# Altium PCB MD5133-A01-02.PcbDoc
Units mil, origin at the board's own origin, x right, y up, seen from the top; angles counter-clockwise.
Board outline 1563 x 997.14 mil, 2 copper layers (TopLayer, BottomLayer); 30 components, 24 nets, 236 pads, 0 vias.
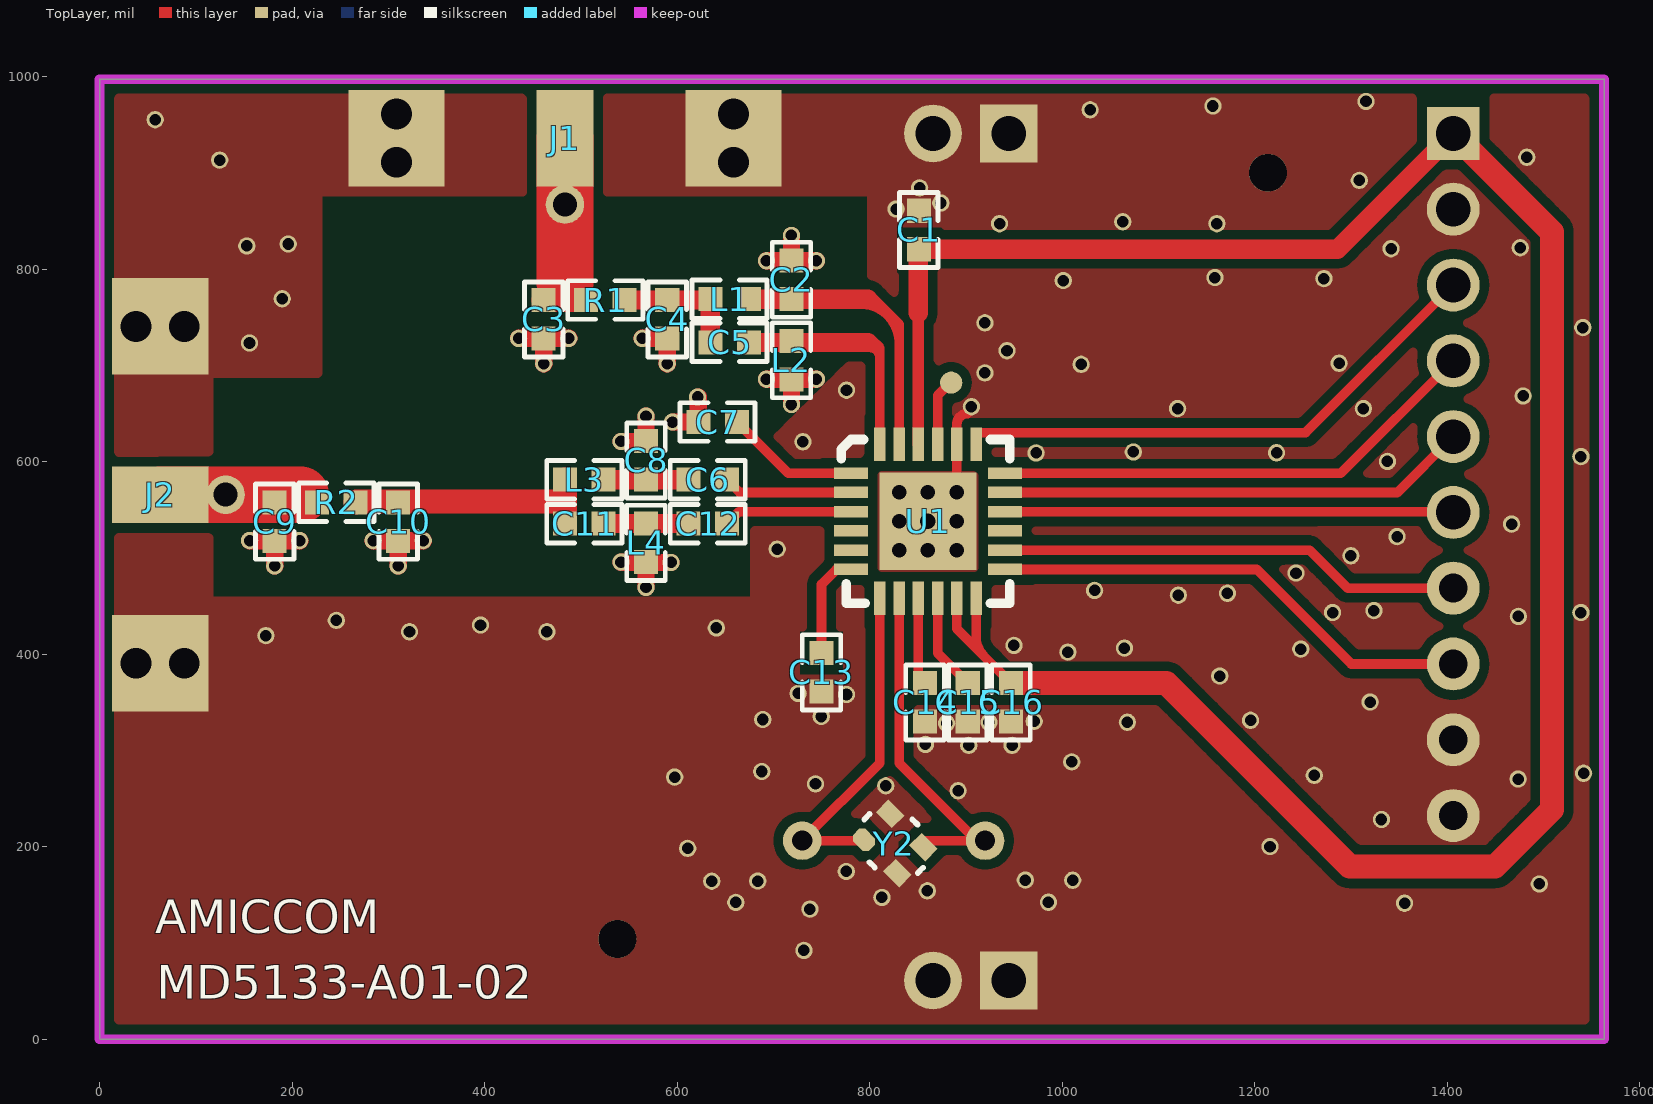
[diagram p0: TopLayer view]
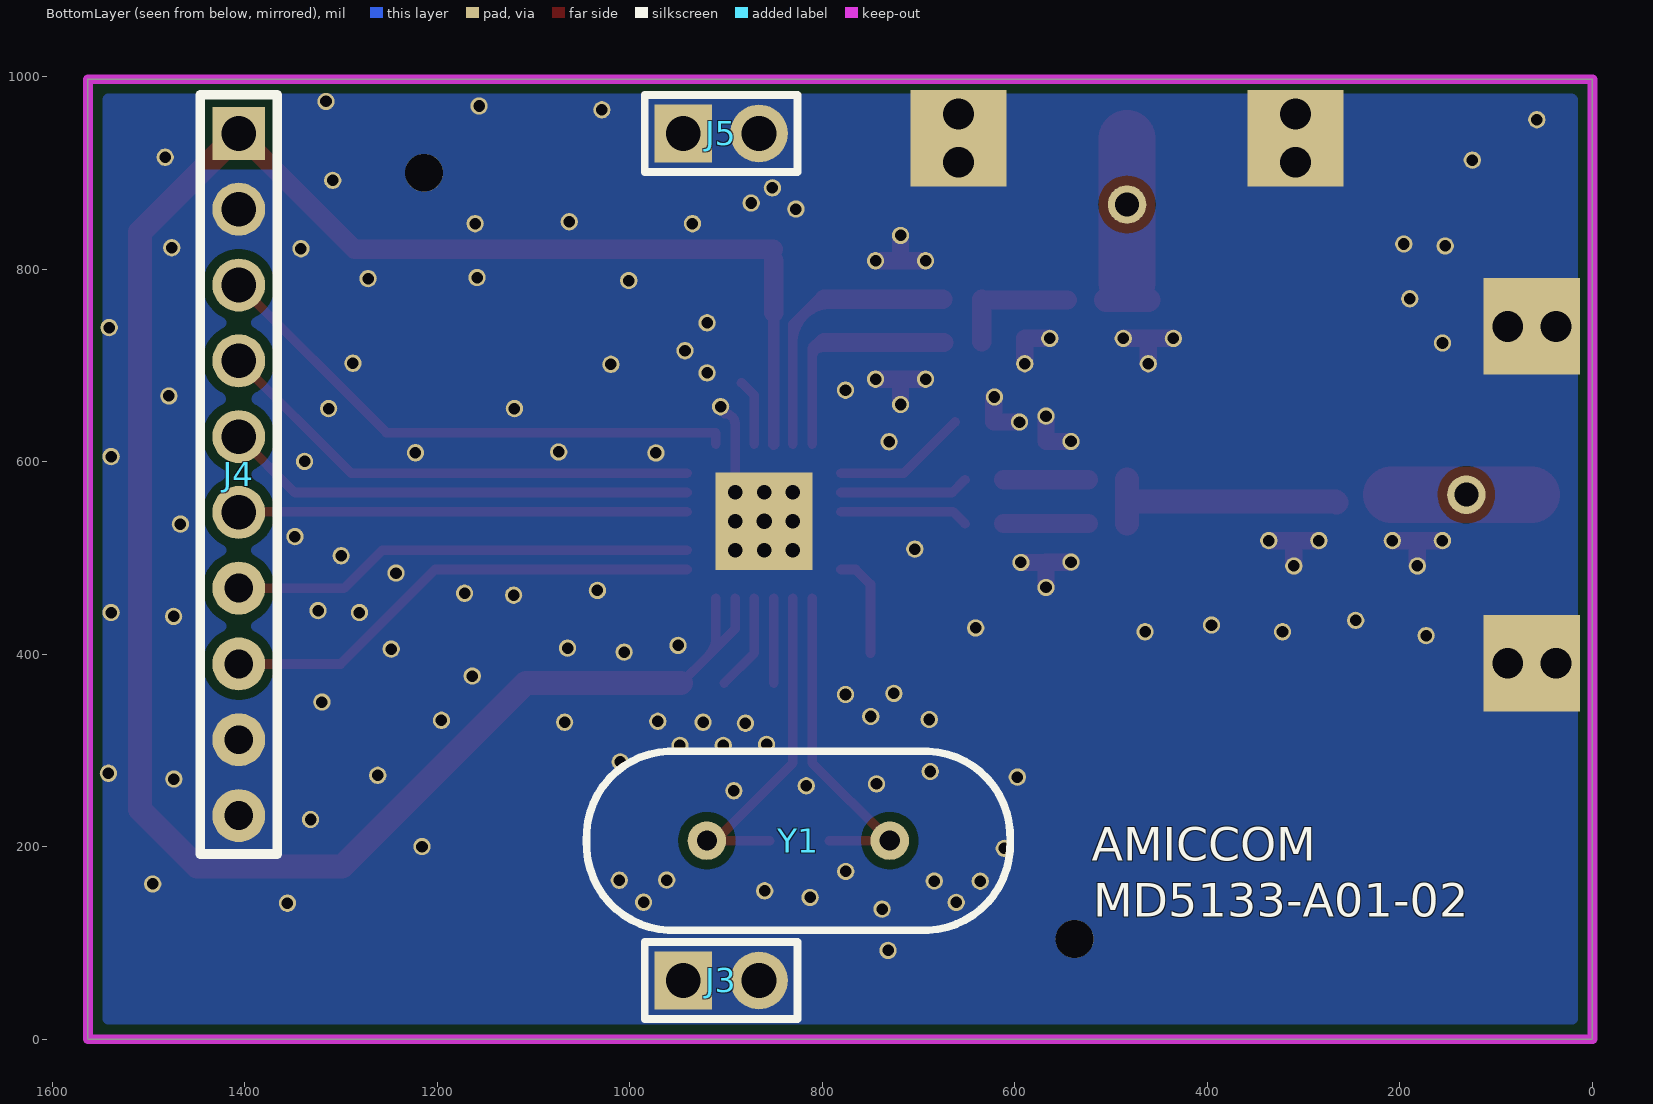
[diagram p1: BottomLayer view, seen from below]

## Layer stack, top to bottom
TopLayer: signal copper 1.4
Dielectric: dielectric 12.6, FR-4, Dk 4.8
BottomLayer: signal copper 1.4

## Board outline
0,0 1563,0 1563,997.14 0,997.14

## Design rules (kind name [scope] priority, off if disabled: settings)
Clearance IsSMTPin [IsSMTPin vs IsSMTPin] p1: gap=5
Clearance SolderMaskTrue [(IsPad  ) And (SolderMaskTentingTop = 'True') And (SolderMaskTentingBottom = 'True') vs (IsPad or Isvia)] p2: gap=6
Clearance SolderMaskFalse [(IsPad) And (SolderMaskTentingTop = 'False') And (SolderMaskTentingBottom = 'false') vs (IsPad or Isvia)] p3: gap=12
Clearance ThruPin&IsVia [(IsThruPin)or(IsVia) vs (IsThruPin)or(IsVia)] p4: gap=10
Clearance InPolygon [InPolygon] p5: gap=10
Clearance Clearance_All [All] p6: gap=6
ComponentClearance [All] p1 off: gap=10 collisioncheckmode=3 verticalgap=10 showdistances=FALSE
FabricationTestPointUsage TestPointUsage [All] p1: valid=0 allowmultiple=FALSE
FabricationTestpoint Testpoint [All] p1: side=3 testpointundercomponent=TRUE minsize=40 maxsize=100 preferedsize=60 minholesize=20 maxholesize=40 preferedholesize=32 testpointgrid=1 allowsidetop=TRUE allowsidebottom=TRUE usegrid=TRUE gridtolerance=0.01
PasteMaskExpansion PasteMaskExpansion_1 [All] p1: expansion=0
PasteMaskExpansion [All] p2: expansion=0
PlaneConnect PlaneConnect_1 [All] p1: planeconnectstyle=Relief reliefexpansion=20 reliefentries=4 reliefconductorwidth=10 reliefairgap=10
PlaneConnect [All] p2: planeconnectstyle=Relief reliefexpansion=20 reliefentries=4 reliefconductorwidth=10 reliefairgap=10
PolygonConnect [All] p1: connectstyle=Direct reliefconductorwidth=10 reliefentries=4 polygonreliefangle="90 Angle" airgapwidth=10
RoutingVias [All] p1: holewidth=16 width=26 viastyle="Through Hole" minholewidth=12 minwidth=18 maxholewidth=28 maxwidth=50
SilkscreenOverComponentPads [IsPad] p1: minsilkscreentomaskgap=10
SolderMaskExpansion SolderMaskExpansion_1 [HasPad('*A')] p1: expansion=-30
SolderMaskExpansion [(IsVia)] p2: expansion=-30
Width Width_1 [All] p1: maxlimit=100 minlimit=6 preferedwidth=10
22 further rules are at their usual default settings.

## Components (designator, comment, footprint, x,y, rotation, side; value= is the part's Value field where it differs from the comment)
C1 "0.1uF" 0402 851.18,820.56 r90 top (schematic designator C27)
C2 "0.2pF" 0402 718.82,808.89 r270 top
C3 "NC" 0402 461.42,727.64 r90 top (schematic designator C4)
C4 "NC" 0402 589.76,727.64 r90 top (schematic designator C5)
C5 "0.2pF" 0402 634.57,723.85 r0 top (schematic designator C6)
C6 "5.6pF" 0402 611.81,581.19 r0 top (schematic designator C8)
C7 "0.22uF" 0402 622.05,641.03 r0 top (schematic designator C9)
C8 "0.4pF" 0402 567.72,581.19 r90 top (schematic designator C10)
C9 "NC" 0402 181.89,557.57 r270 top (schematic designator C11)
C10 "0.3pF" 0402 310.24,557.57 r270 top (schematic designator C12)
C11 "0.4pF" 0402 523.62,535.52 r180 top (schematic designator C15)
C12 "5.6pF" 0402 611.81,535.52 r0 top (schematic designator C16)
C13 "0.22uF" 0402 750,361 r90 top (schematic designator C19)
C14 "10nF" 0402 857.63,369.77 r270 top (schematic designator C21)
C15 "0.22uF" 0402 902,369.77 r270 top (schematic designator C22)
C16 "2.2uF" 0402 947,369.77 r270 top (schematic designator C23)
J1 "SMA CONNECTOR" "SMA CONNECTOR" 483.54,935.94 r180 top locked
J2 "SMA CONNECTOR" "SMA CONNECTOR" 62.99,565.44 r90 top
J3 "CON/2P 2.0" HDR2_2.0 944.65,60.88 r180 bottom
J4 "CON/10P 2.0" HDR10_2.0 1406.38,940.88 r270 bottom (schematic designator J5)
J5 "CON/2P 2.0" HDR2_2.0 944.65,940.88 r180 bottom (schematic designator J4)
L1 "3.6nH" 0402 634.57,768.74 r0 top
L2 "3.6nH" 0402 718.82,685.27 r90 top
L3 "2.4nH" 0402 523.62,581.19 r180 top
L4 "2.4nH" 0402 567.72,535.52 r270 top
R1 "0R" 0402 505.51,767.8 r0 top (schematic designator R2)
R2 "0R" 0402 225.98,557.57 r0 top (schematic designator R3)
U1 "A5133-U01" "QFN 4*4 24L_A7190" 860.63,537.88 r0 top locked
Y1 "NC" XTAL1 825,206.14 r0 bottom locked
Y2 "SMD 2.0x1.6mm" "XTAL_2.0 *1.6" 825,203.14 r315 top (schematic designator Y4)

## Footprints (in the part's own frame and the unit in brackets; to place one, negate y for a bottom-side part, rotate by r counter-clockwise, add the part's x,y. Pads: shape width x height; smd on the part's side, far side on the other; paste and mask are expansions set on the pad)
0402 [mil]
  rect 25x25 smd: 1(0,0) 2(40,0)
  silkscreen extent -19,-20 59,20
HDR2_2.0 [mil]
  rect 60x60 hole 36: 1(0,0)
  round 60 hole 36: 2(78.74,0)
  silkscreen extent -40,-40 119,40
HDR10_2.0 [mil]
  rect 55x55 hole 36: 1(0,0)
  round 55 hole 36: 2(78.74,0) 3(157.48,0) 4(236.22,0) 5(314.96,0) 6(393.7,0)
  round 55 hole 30: 7(472.44,0) 8(551.18,0) 9(629.92,0) 10(708.66,0)
  silkscreen extent -40,-40 749,40
"QFN 4*4 24L_A7190" [mil]
  rect 35x12 smd: 1(-80,50) 2(-80,30) 3(-80,10) 4(-80,-10) 5(-80,-30) 6(-80,-50) 13(80,-50) 14(80,-30) 15(80,-10) 16(80,10) 17(80,30) 18(80,50)
  rect 12x35 smd: 7(-50,-80) 8(-30,-80) 9(-10,-80) 10(10,-80) 11(30,-80) 12(50,-80) 19(50,80) 20(30,80) 21(10,80) 22(-10,80) 23(-30,80) 24(-50,80)
  rect 101x101 hole 16: ""(0,0)
  silkscreen extent -90,-85 85,85
"SMA CONNECTOR" [mil]
  rect 100x50 hole 32: 0(-175,-25) 0(-175,25) 0(175,-25) 0(175,25)
  rect 59.05x100 smd: 1(0,0)
XTAL1 [mil]
  round 40 hole 20.87: 1(-95,0) 2(95,0)
  silkscreen extent -220,-93 220,93
"XTAL_2.0 *1.6" [mm]
  oct 0.6x0.47 smd: 1(-0.62,-0.485)
  rect 0.6x0.47 smd: 2(0.62,-0.485) 3(0.62,0.485) 4(-0.62,0.485)
  silkscreen extent -1,-0.8 1,0.8

## Part data
C1 C7 C13 C14 C15 C16: library part CAP
C2 C3 C4 C5 C6 C8 C9 C10 C11 C12: library part C/0603, "Chip C"
J3 J4 J5: "Hole 36mil"
L1 L2 L3 L4: library part L/0603
R1 R2: library part R/0402, "Chip R"
U1: library part A5133_U01
Y1: library part CRYSTAL, "16MHz"
Y2: library part CRYSTAL/5*3.2, "(TST)16MHz,Cl=9pF"

## Free pads (board coordinates)
  round 18 hole 12: A(57.79,955.14) A(124.79,913.14) A(153,824) A(155.79,723.14) A(155.89,517.88) A(172.79,419.14) A(181.89,491.57) A(189.79,769.14) A(196,826) A(207.89,517.88) A(246,435) A(284.24,517.88) A(310.24,491.57) A(322,423.14) A(336.24,517.88) A(395.79,430.14) A(435.42,727.96) A(461.42,701.64) A(464.79,423.14) A(487.42,727.96) A(541.72,495.52) A(541.72,620.87) A(563.76,727.96) A(567.72,469.2) A(567.72,647.19) A(589.76,701.64) A(593.72,495.2) A(595.26,641.03) A(597.5,272.14) A(611,198.14) A(621.26,667.03) A(636,164) A(640.79,427.14) A(661,142) A(683.79,164.14) A(688,278) A(689,332) A(692.82,685.59) A(692.82,808.58) A(704,509) A(718.82,659.27) A(718.82,834.89) A(725.79,359.14) A(730.71,620.56) A(731.79,92.14) A(738,135) A(743.79,265.14) A(744.82,685.59) A(744.82,808.58) A(749.79,335.14) A(775.79,174.14) A(776,358) A(776,674.14) A(812.79,147.14) A(816.79,263.14) A(827.56,862.29) A(851.97,884.34) A(858,306.14) A(860,154) A(874.02,868.59) A(880,328.14) A(892,258) A(903,305.14) A(905.79,657) A(919.79,692.14) A(919.79,744.14) A(924,329.14) A(935,847.14) A(942.79,715.14) A(948,305.14) A(950,409) A(961.79,165.14) A(971,330.14) A(973,609) A(985.79,142.14) A(1001.18,788) A(1006,402) A(1010,288) A(1011,165) A(1019.79,701) A(1029.13,965.44) A(1033.79,466.14) A(1063,849.14) A(1064.79,406.14) A(1067.79,329.14) A(1074,610) A(1120,655) A(1120.79,461.14) A(1156.69,969.38) A(1158.79,791.14) A(1160.79,847.14) A(1163.79,377.14) A(1171.79,463.14) A(1195.79,331.14) A(1216,200) A(1222.79,609.14) A(1243,484.14) A(1248,405.14) A(1262,274) A(1272,790) A(1281,443.14) A(1287.79,702.14) A(1300,502.14) A(1308.79,892.14) A(1313,655) A(1315.75,974.1) A(1320,350.14) A(1324,445.14) A(1331.79,228.14) A(1338,600.14) A(1341.79,821.14) A(1348,522) A(1355.79,141.14) A(1467,535) A(1473.79,270.14) A(1474,439.14) A(1476,822.14) A(1479,668.14) A(1482.79,916.14) A(1495.79,161.14) A(1539,443.14) A(1539,605.14) A(1541,739.14) A(1541.79,276.14)
  round 39.37 hole 39.37: A(538,104) A(1213.79,900)
  round 40 hole 25: B(131,565.57) B(483.54,867)
  round 23 smd: R(884.79,682)
  round 15 hole 15: ""(830.63,507.88) ""(830.63,537.88) ""(830.63,567.88) ""(860.63,507.88) ""(860.63,567.88) ""(890.63,507.88) ""(890.63,537.88) ""(890.63,567.88)

## Nets (pads, with @x,y where several pads share a name; then routed paths per layer and width w, separated by ;. In a path a pad name is that pad's centre, name@x,y a point inside that pad or via, vN(x,y) a via of type N, cw(c..) or ccw(c..) an arc to the next point about the centre after c; other vN are vias at no path point)
BG: C14.1 U1.9 | length 88.1
  TopLayer w10: C14.1@850.63,369.77 U1.9
CKO: J4.3 U1.19 | length 571.4
  TopLayer w10: U1.19 910.63,630 1252.97,630 J4.3
GIO1: J4.5 U1.17 | length 489.8
  TopLayer w10: U1.17 1348.34,567.88 J4.5
GIO2: J4.4 U1.18 | length 514.1
  TopLayer w10: U1.18 1289.59,587.88 J4.4
GND: C1.2 C2.1 C3.1 C4.1 C7.1 C8.2 C9.2 C10.2 C13.1 C14.2 C15.2 C16.2 J1.0 J2.0 J3.1 J3.2 J4.2 J4.9 J4.10 J5.1 J5.2 L2.1 L4.2 pad. pad.A U1. U1.20 Y2.2 Y2.4 | length 754.8
  TopLayer w10: U1. 890.63,567.88 U1.20 890.63,638.72 cw(c901.79,638.72) pad.A@901.79,649.88
  TopLayer w18: pad.A@155.89,517.88 pad.A@207.89,517.88 ; pad.A@181.89,491.57 C9.2 ; pad.A@284.24,517.88 pad.A@336.24,517.88 ; pad.A@310.24,491.57 C10.2 ; pad.A@435.42,727.96 pad.A@487.42,727.96 ; pad.A@461.42,701.64 C3.1 ; pad.A@541.72,495.52 L4.2 ; pad.A@541.72,620.87 C8.2@567.72,620.87 ; pad.A@563.76,727.96 C4.1@589.76,727.96 ; pad.A@567.72,469.2 567.72,495.2 pad.A@593.72,495.2 ; C8.2 pad.A@567.72,647.19 ; pad.A@589.76,701.64 C4.1 ; pad.A@596.05,641.03 C7.1 pad.A@622.05,667.03 ; pad.A@692.82,685.59 pad.A@744.82,685.59 ; pad.A@692.82,808.58 pad.A@744.82,808.58 ; pad.A@718.82,659.27 L2.1 ; C2.1 pad.A@718.82,834.89
NetC2_2: C2.2 L1.2 U1.23 | length 353.7
  TopLayer w10: L1.2 L1.2@674.72,768.59 ; 790.73,763.64 cw(c790.73,723.74) 830.63,723.74 ; 800.5,772.94 830.63,742.81 830.63,723.74 ; U1.23 830.63,723.74
  TopLayer w20: L1.2@674.72,768.59 798,768.59
NetC3_2: C3.2 J1.1 pad.B@483.54,867 R1.1 | length 194.3
  TopLayer w25: C3.2 R1.1@505.35,767.64
  TopLayer w59: 483.54,785.55 J1.1
NetC4_2: C4.2 C5.1 L1.1 R1.2 | length 132.5
  TopLayer w20: R1.2 L1.1@633.86,767.8 ; C5.1@634.57,724.57 L1.1
NetC5_2: C5.2 L2.2 U1.24 | length 258.7
  TopLayer w10: 793.6,718.64 800.13,718.64 cw(c800.13,708.14) 810.63,708.14 ; 802.79,726.14 810.63,718.3 810.63,708.14 ; U1.24 810.63,708.14
  TopLayer w20: C5.2@673.86,723.71 798,723.71
NetC6_1: C6.1 C8.1 L3.1 | length 88.2
  TopLayer w20: L3.1 C8.1 C6.1
NetC6_2: C6.2 U1.2 | length 134.3
  TopLayer w10: C6.2 665.12,567.88 U1.2
NetC9_1: C9.1 J2.1 pad.B@131,565.57 R2.1 | length 190.2
  TopLayer w20: C9.1 R2.1
  TopLayer w59: J2.1 63.12,565.57 209.09,565.57
NetC10_1: C10.1 C11.2 L3.2 R2.2 | length 252.4
  TopLayer w25: R2.2 266.77,558.35 472.22,558.35 472.36,558.5 ; C11.2 L3.2
NetC11_1: C11.1 C12.1 L4.1 | length 88.2
  TopLayer w20: C11.1 L4.1 C12.1
NetC12_2: C12.2 U1.3 | length 133.9
  TopLayer w10: C12.2 664.17,547.88 U1.3
REGI: C1.1 C16.1 J4.1 U1.11 U1.12 U1.22 | length 2379.8
  TopLayer w10: U1.11 890.63,426.14 918.62,398.15 ; U1.12 910.63,417.45 ccw(c937.94,417.45) 918.62,398.15 ; C16.1 918.63,398.14
  TopLayer w12: U1.22 850.63,754.42
  TopLayer w20: 850.63,754.42 C1.1@850.63,808.76 ; C1.1 1286.05,820.56 J4.1
  TopLayer w25: C16.1 1108.23,369.77 1298.86,179.14 1449.79,179.14 1509,238.35 1509,548.16 1509,838.26 J4.1
SCK: J4.7 U1.14 | length 482.1
  TopLayer w10: U1.14 1257.26,507.88 1296.7,468.44 J4.7
SCS: J4.8 U1.13 | length 506.4
  TopLayer w10: U1.13 1202.26,487.88 1300.44,389.7 J4.8
SDIO: J4.6 U1.16 | length 466
  TopLayer w10: U1.16 1405.68,547.88 J4.6
VDD_D: C15.1 U1.10 | length 101.1
  TopLayer w10: U1.10 870.63,401.14 C15.1
VDD_P: C13.2 U1.6 | length 108.4
  TopLayer w10: C13.2 750,472.35 765.53,487.88 U1.6
VDD_PA: C7.2 U1.1 | length 140.6
  TopLayer w10: C7.2@662.13,641.11 715.35,587.88 U1.1
XI: U1.8 Y1.2 Y2.3 | length 350.4
  TopLayer w10: U1.8 830.63,286.77 Y1.2@911.26,206.14 ; Y2.3@854.79,206.14 Y1.2@911.26,206.14 ; Y1.2 Y1.2@911.26,206.14
XO: U1.7 Y1.1 Y2.1 | length 348.3
  TopLayer w10: Y2.1@793.02,205.9 792.78,206.14 Y1.1 810.63,286.77 U1.7
pads on no net: U1.4 U1.5 U1.15 U1.21
copper on no net: | length 69.7
  TopLayer w10: 870.63,617.88 870.63,668.63 884,682

## Polygon pours and split planes (outlines as drawn)
GND on BottomLayer "BottomLayer-GND" (hatched 90Degree grid 1 track 12, remove dead copper, pour order 3): 1563,995.36 0,995.36 0,0 1563,0 1563,995.36
GND on TopLayer "BottomLayer-No Net" (hatched 90Degree grid 1 track 9, remove dead copper, pour order 4): 1563,996.15 0,996.15 0,1 1563,1 1563,996.15

## Keep-outs
KeepOutLayer:
  the board outline again, w10

## Other copper
TopLayer:
  pour cut-out: 227,880 802,880 802,704.14 783,704.14 680.05,601.19 680.05,455.25 113.79,455.25 113.79,691.14 227,691.14

## Silkscreen, mask and mechanical layers (free items; w line width, h text height)
TopOverlay:
  text "AMICCOM" at 57.8,109.71 h35
  text "MD5133-A01-02" at 59.37,42 h35
BottomOverlay:
  text "AMICCOM" at 520,185.14 h35
  text "MD5133-A01-02" at 518.8,126.87 h35
TopSolder:
  rectangle: 801,478.14 921,597.14
BottomSolder:
  circle w25: c131,565.57 r50.15
  circle w25: c483.54,867 r50.15
  region: 713,881.21 713,908.21 525,908.21 525,881.21
  region: 253,908.79 253,881.79 441,881.79 441,908.79
  rectangle: 90.21,335 117.21,523
  rectangle: 90,607 117,795
  rectangle: 1046.69,144.45 1090.79,264.14
  rectangle: 9,335 92.79,795
  region: 252.98,990 252.98,905.21 712.98,905.21 712.98,990

## Dimensions
0,0 to 1563,0 on KeepOutLayer
0,0 to 0,997.14 on KeepOutLayer